# EAGLE board strampler_panel_v2_2 (EAGLE 7.3.0)
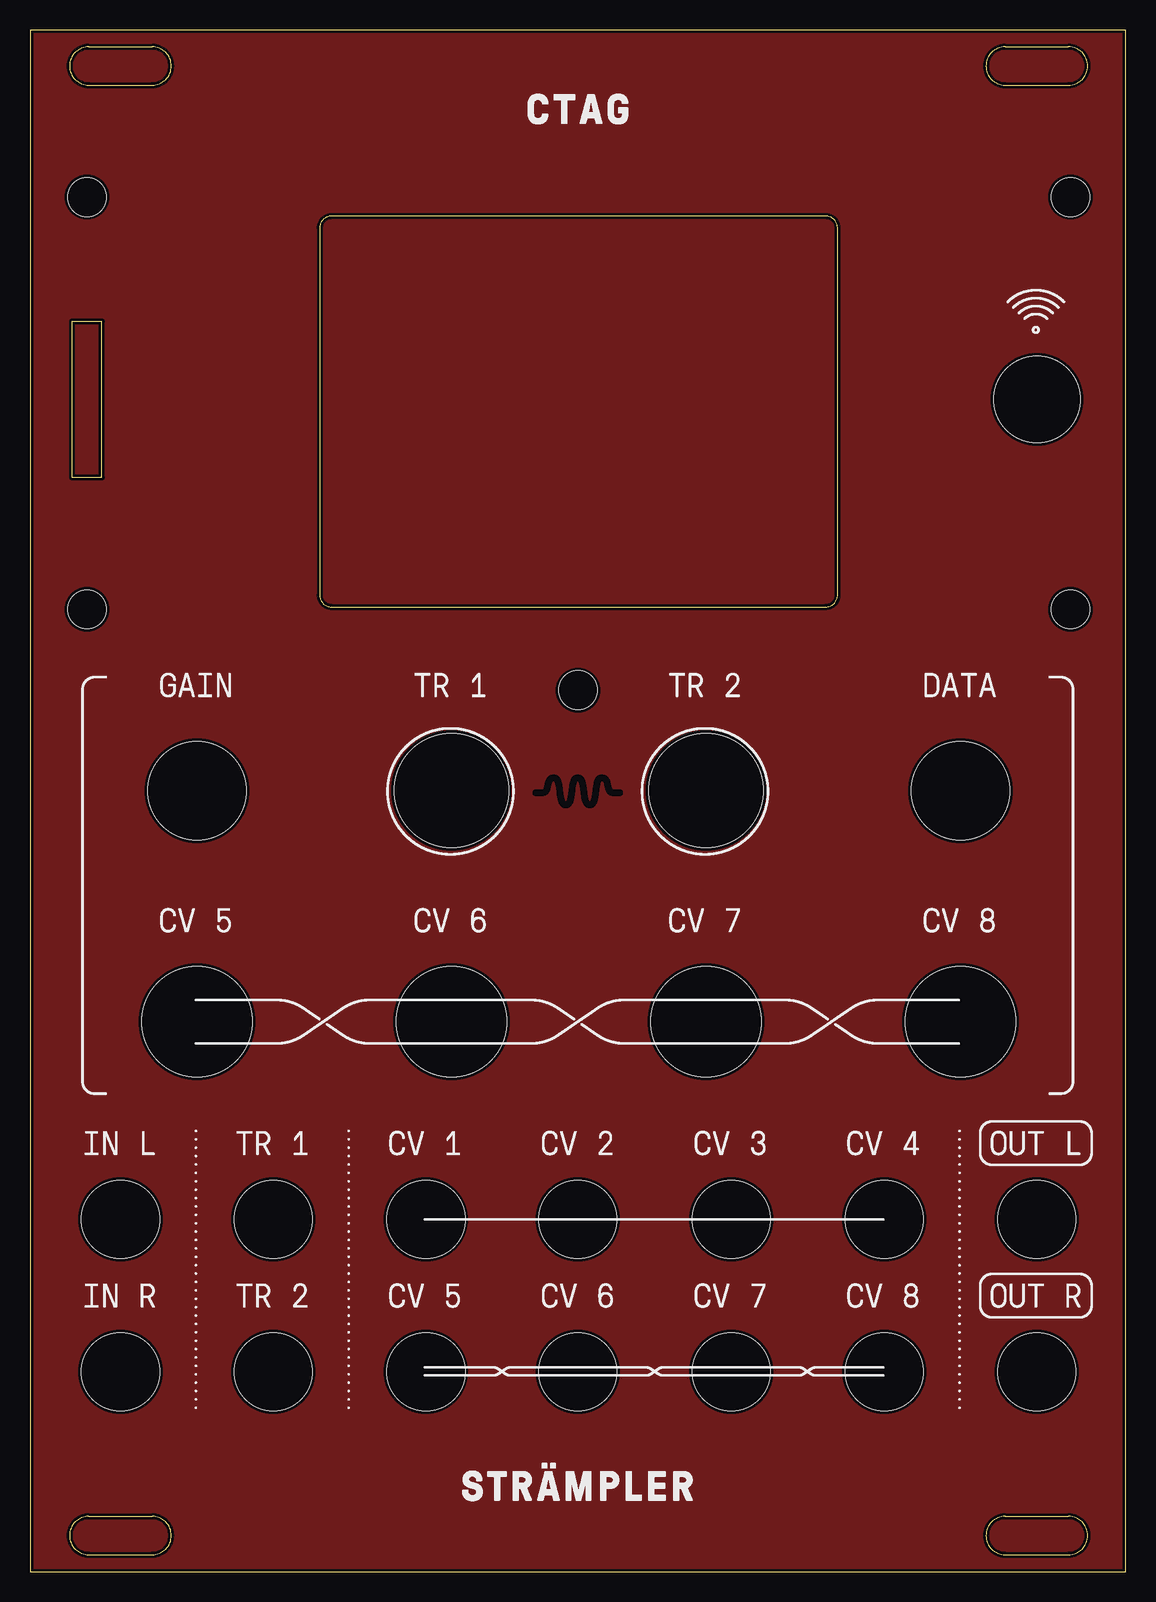
[diagram p0: board, top side]
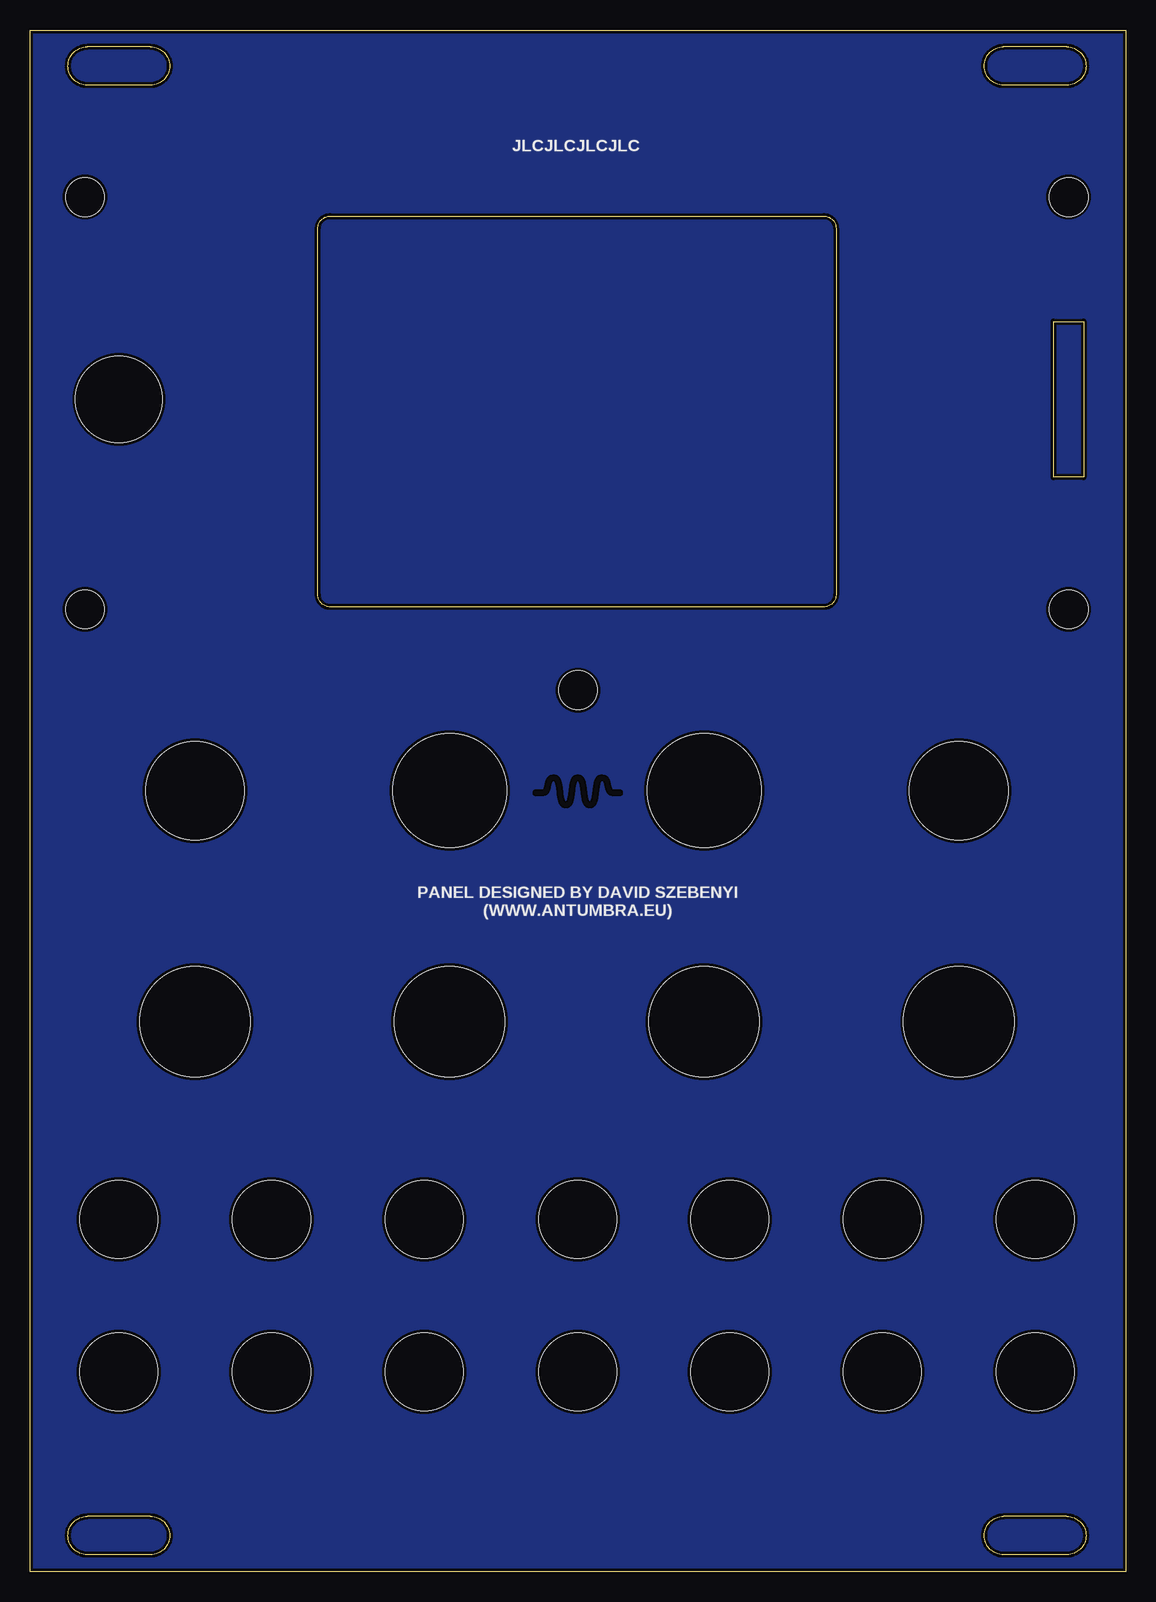
[diagram p1: board, bottom side, seen from below]

Size 91.3 x 128.5 mm. Coordinates in mm from the lower left corner, seen from the top.
Outline: 0,0 91.3,0 91.3,128.5 0,128.5 0,0
Outline: 25.13,80.41 66.31,80.41 arc90 67.31,81.41 67.31,111.98 arc90 66.31,112.98 25.13,112.98 arc90 24.13,111.98 24.13,81.41 arc90 25.13,80.41
Outline: 3.49,104.21 3.49,91.22 6,91.22 6,104.21 3.49,104.21
Copper layers (1*16): Top 0.035mm / dielectric 1.5mm / Bottom 0.035mm
Design rules "default *": minimum track width 10mil, minimum drill 24mil, track to track 8mil, track to pad 8mil, pad to pad 8mil, via to via 8mil, smd to smd 8mil, copper to edge 10mil, drill to drill 8mil, minimum pad ring 10mil, minimum via ring 8mil, stop-mask expansion 4mil, vias tented up to drill 0mil, thermal gap 10mil
Holes 9.5 mm at 35.12,65.1 56.33,65.1
Holes 7.2 mm at 83.9,97.69
tRestrict: area 44.6,63.6 to 44.7,63.7; area 46.6,63.6 to 46.7,63.7; area 44.5,63.7 to 44.8,63.7; area 46.5,63.7 to 46.8,63.7; area 44.5,63.7 to 44.8,63.7; area 46.5,63.7 to 46.8,63.7; area 44.4,63.7 to 44.9,63.7; area 46.4,63.7 to 46.9,63.7; area 44.4,63.7 to 44.9,63.7; area 46.4,63.7 to 46.9,63.7; area 44.4,63.7 to 44.9,63.7; area 46.4,63.7 to 46.9,63.7; 926 more areas
bRestrict: area 44.6,63.6 to 44.7,63.7; area 46.6,63.6 to 46.7,63.7; area 44.5,63.7 to 44.8,63.7; area 46.5,63.7 to 46.8,63.7; area 44.5,63.7 to 44.8,63.7; area 46.5,63.7 to 46.8,63.7; area 44.4,63.7 to 44.9,63.7; area 46.4,63.7 to 46.9,63.7; area 44.4,63.7 to 44.9,63.7; area 46.4,63.7 to 46.9,63.7; area 44.4,63.7 to 44.9,63.7; area 46.4,63.7 to 46.9,63.7; 926 more areas

## Footprints (pad centres in the part's own frame; a part is rotated, then mirrored left to right if it is on the bottom)
JACK_IN = hole 6.5: 0,0
POT_LARGE_HOLE = hole 9.2: 0,0
POT_MEDIUM = hole 8.2: 0,0
SCREW_3M = hole 3.2: 0,0

## Placement (x,y rotation side)
E$1  [JACK_IN]  7.54,16.65 0 top
E$2  [JACK_IN]  7.54,29.35 0 top
E$3  [JACK_IN]  20.27,29.35 0 top
E$4  [JACK_IN]  20.27,16.65 0 top
E$5  [JACK_IN]  32.99,29.35 0 top
E$6  [JACK_IN]  32.99,16.65 0 top
E$7  [JACK_IN]  45.65,29.35 0 top
E$8  [JACK_IN]  45.65,16.65 0 top
E$9  [JACK_IN]  58.45,29.35 0 top
E$10  [JACK_IN]  71.18,29.35 0 top
E$11  [JACK_IN]  83.9,29.35 0 top
E$12  [JACK_IN]  58.45,16.65 0 top
E$13  [JACK_IN]  71.18,16.65 0 top
E$14  [JACK_IN]  83.9,16.65 0 top
E$15  [POT_LARGE_HOLE]  13.9,45.83 0 top
E$16  [POT_LARGE_HOLE]  35.12,45.83 0 top
E$17  [POT_LARGE_HOLE]  56.33,45.83 0 top
E$18  [POT_LARGE_HOLE]  77.54,45.83 0 top
E$19  [POT_MEDIUM]  13.9,65.1 0 top
E$20  [POT_MEDIUM]  77.54,65.1 0 top
E$21  [RAIL_SCREW_HOLE]  7.54,3 0 top
E$22  [RAIL_SCREW_HOLE]  83.9,3 0 top
E$23  [RAIL_SCREW_HOLE]  7.54,125.5 0 top
E$24  [RAIL_SCREW_HOLE]  83.9,125.5 0 top
E$25  [SCREW_3M]  4.74,114.56 0 top
E$26  [SCREW_3M]  4.74,80.22 0 top
E$27  [SCREW_3M]  86.72,114.56 0 top
E$28  [SCREW_3M]  86.72,80.22 0 top
E$29  [SCREW_3M]  45.65,73.48 0 top

## Library data of the parts
E$1-E$29 = antumbra_panel

## Tracks (layer width: path | path; a pad name or v marks a point on that pad's centre or on a via)
S$1
  pour Top: 0,0 91.3,0 91.3,128.5 0,128.5
S$2
  pour Bottom: 0,0 91.3,0 91.3,128.5 0,128.5

## Text on the board
bPlace: JLCJLCJLCJLC | PANEL DESIGNED BY DAVID SZEBENYI / (WWW.ANTUMBRA.EU)